# Altium PCB Plate_B.PcbDoc
Units mm, origin at the board's own origin, x right, y up, seen from the top; angles counter-clockwise.
Board outline 100 x 100 mm, 2 copper layers (Top Layer, Bottom Layer), stack 0.97 mm thick; 6 components, 2 nets, 10 pads, 0 vias.
Unrouted connection lines stored in the file: 2.
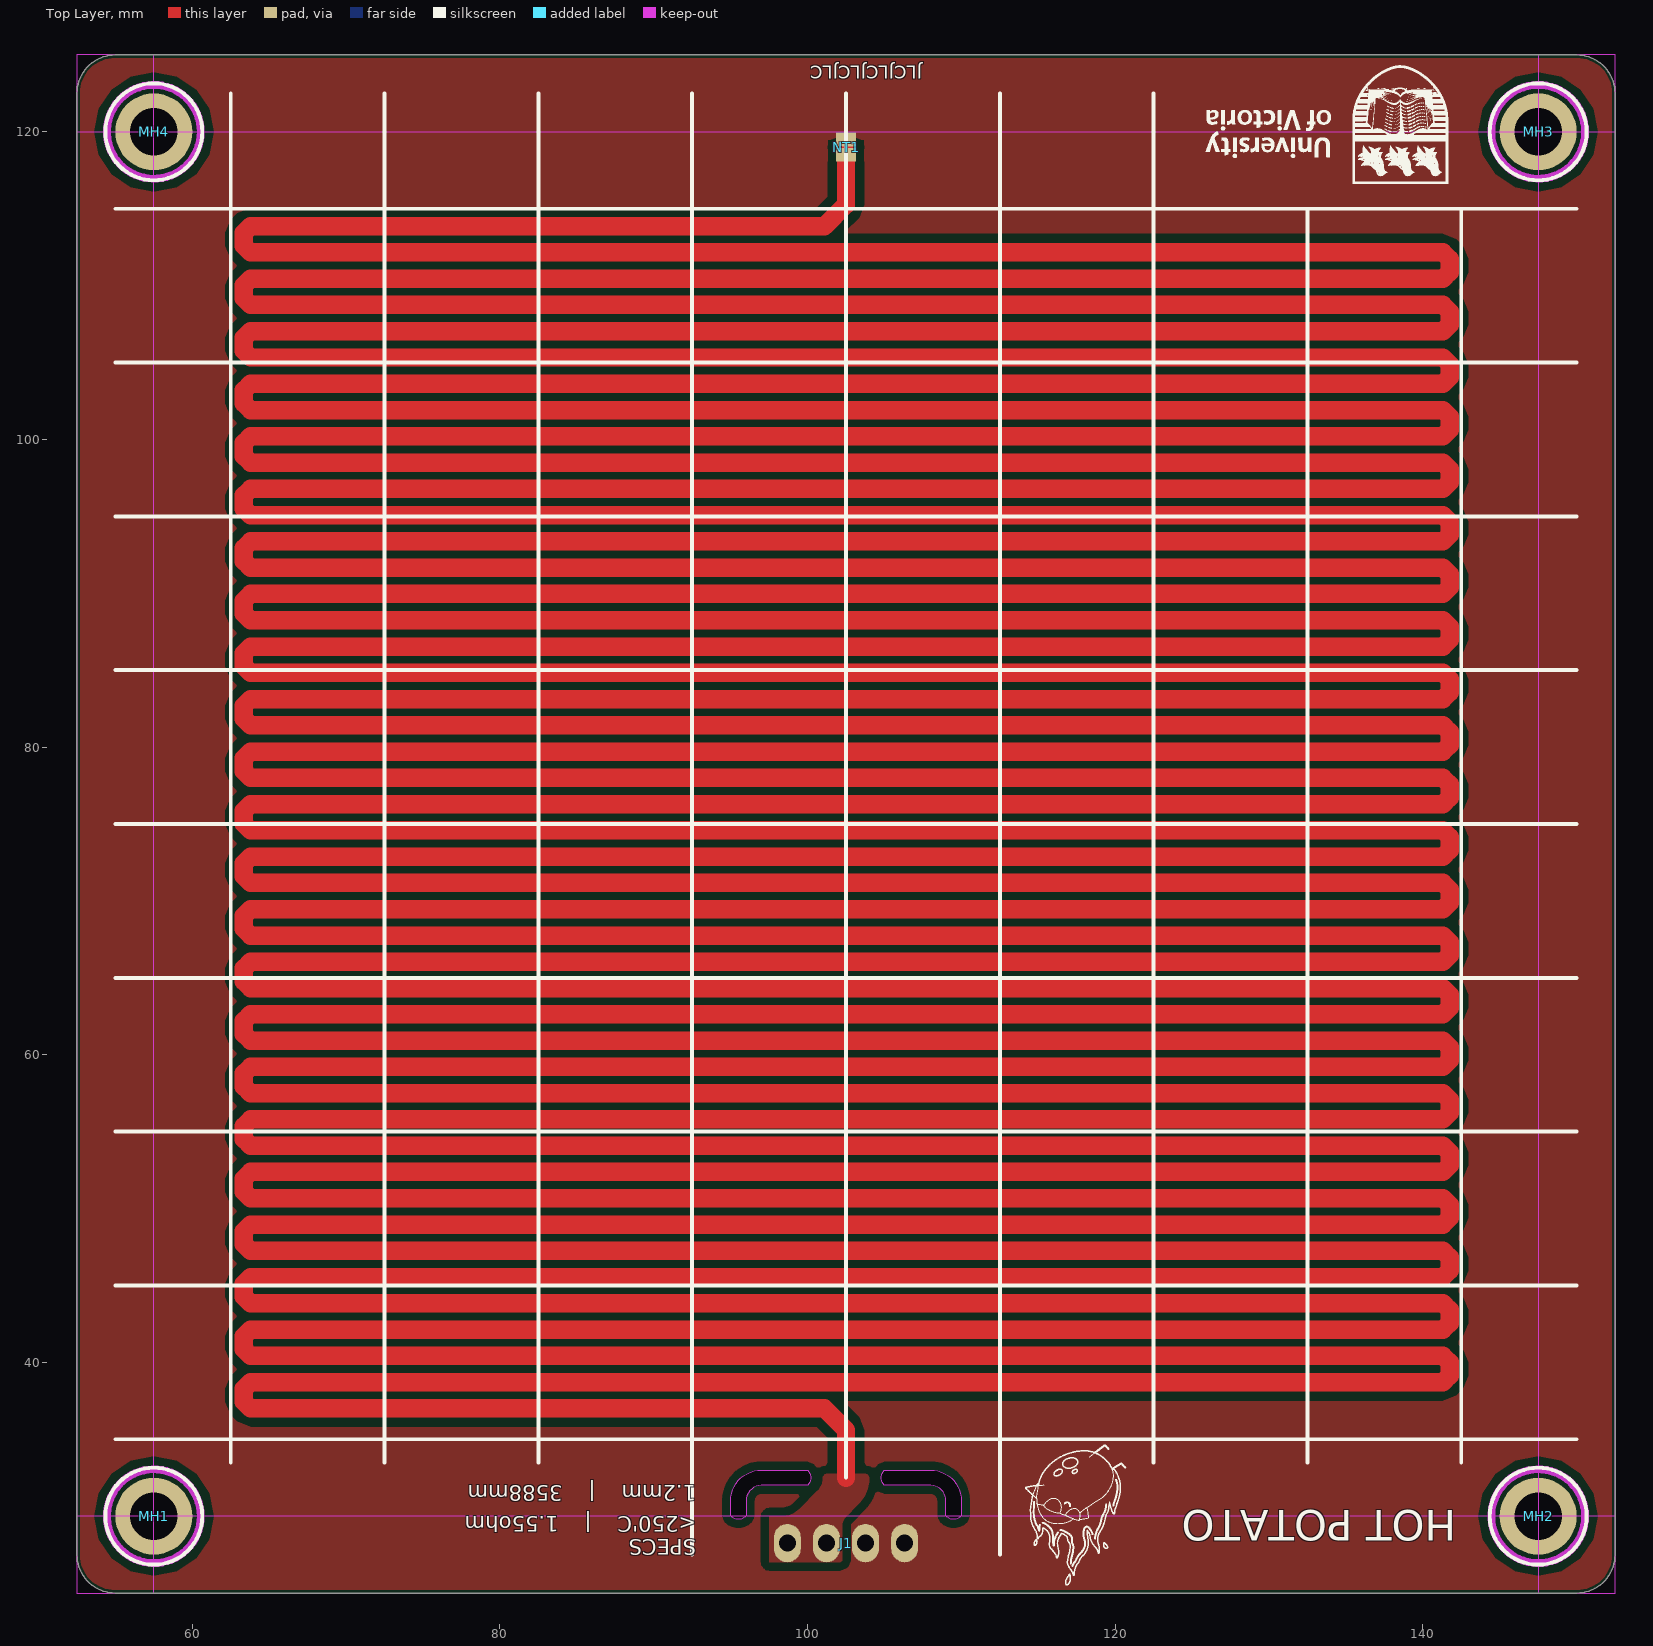
[diagram p0: Top Layer view]
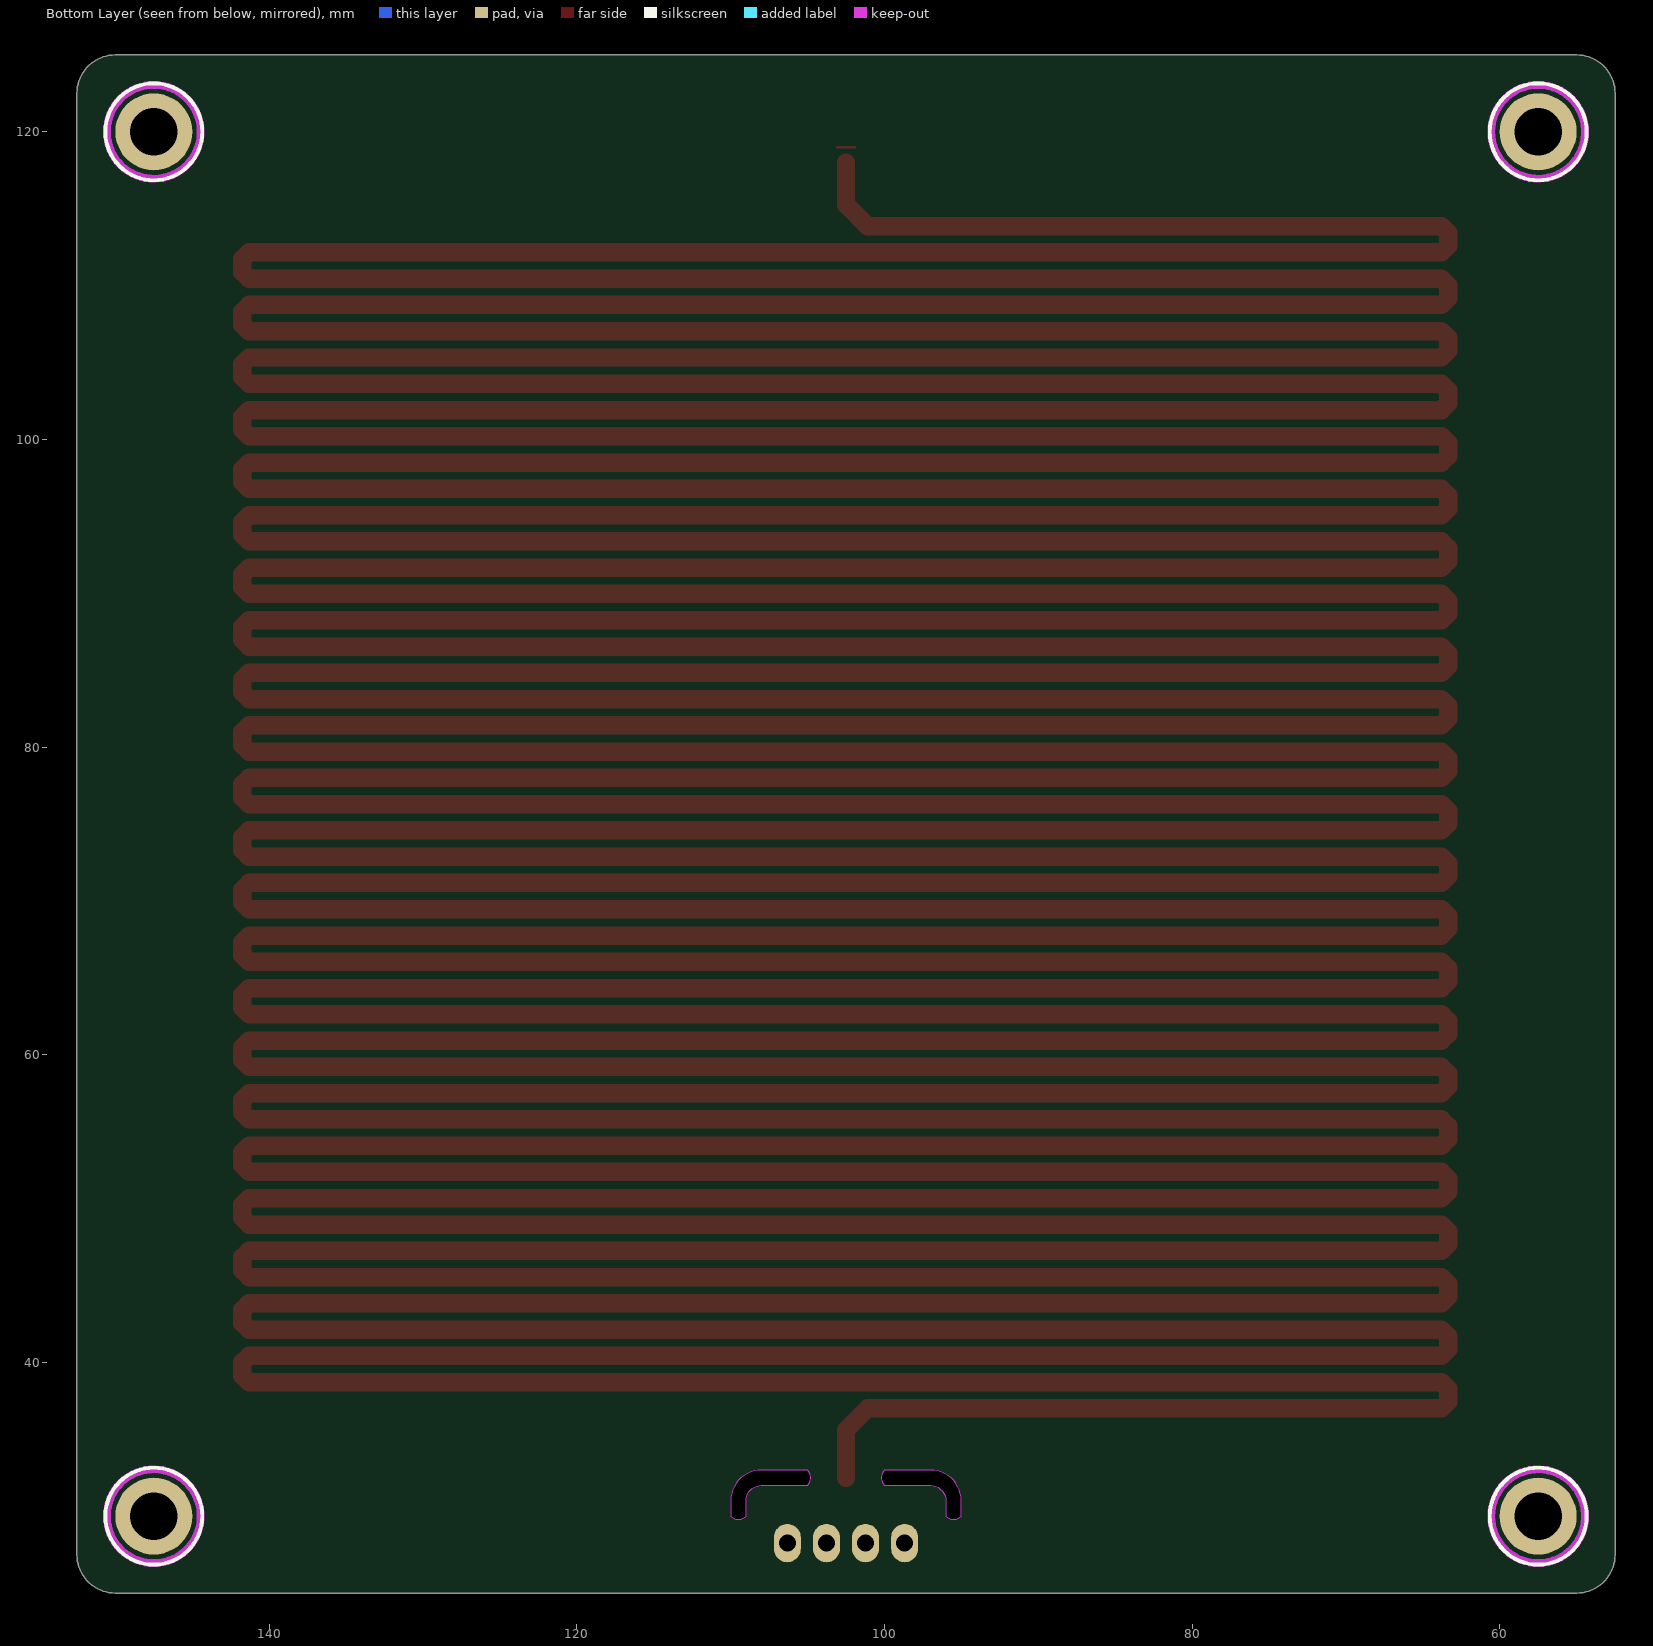
[diagram p1: Bottom Layer view, seen from below]

## Layer stack, top to bottom
Top Solder: solder mask 0.0127, Solder Resist, Dk 3.8
Top Layer: signal copper 0.035
Dielectric: core 0.9, FR-4, Dk 4.5
Bottom Layer: signal copper 0.035
Bottom Solder: solder mask 0.0127, Solder Resist, Dk 3.8

## Board outline
52.5,27.5 ccw(c55,27.5) 55,25 150,25 ccw(c150,27.5) 152.5,27.5 152.5,122.5 ccw(c150,122.5) 150,125 55,125 ccw(c55,122.5) 52.5,122.5
cut-out: 95,30 95,31 cw(c97,31) 97,33 100,33 cw(c99.5,32.5) 100,32 97,32 ccw(c97,31) 96,31 96,30 cw(c95.5,30.5)
cut-out: 105,32 cw(c105.5,32.5) 105,33 108,33 cw(c108,31) 110,31 110,30 cw(c109.5,30.5) 109,30 109,31 ccw(c108,31) 108,32

## Design rules (kind name [scope] priority, off if disabled: settings)
BoardOutlineClearance [All] p1: gap=0.2 ignorepadtopadclearanceinfootprint=FALSE
Clearance "Polygon Pour Clearance" [InPolygon] p1: gap=0.508 ignorepadtopadclearanceinfootprint=FALSE
Clearance [All] p2: gap=0.127 ignorepadtopadclearanceinfootprint=FALSE except(0.25: Arc-Hole Track-Hole SMDPad-Hole THPad-Hole Via-Hole Fill-Hole Poly-Hole Region-Hole Text-Hole)
ComponentClearance [All] p1: gap=0.127 collisioncheckmode=3 verticalgap=0.127 showdistances=TRUE
DiffPairsRouting [All] p1: maxlimit=0.254 minlimit=0.127 mostfreqgap=0.127 toplayer_minwidth=0.127 toplayer_maxwidth=25.4 toplayer_prefwidth=0.127 bottomlayer_minwidth=0.127 bottomlayer_maxwidth=25.4 bottomlayer_prefwidth=0.127 maxuncoupledlength=12.7
Height [All] p1: minheight=0 maxheight=1816.048 prefheight=12.7
HoleSize [All] p1: absolutevalues=TRUE maxlimit=6.3 minlimit=0.3 maxpercent=80.000 minpercent=20.000
HoleToHoleClearance [All] p1: gap=0.25 allowstackedmicrovias=FALSE
MinimumAnnularRing [All] p1: minimumring=0.076
MinimumSolderMaskSliver [All] p1: minsoldermaskwidth=0
PlaneClearance [All] p1: clearance=0.127
PlaneConnect PlaneConnectPowerPads [InPadClass('PowerPads')] p1: planeconnectstyle=Direct reliefexpansion=0.508 reliefentries=4 reliefconductorwidth=0.254 reliefairgap=0.254
PlaneConnect [All] p2: pad.planeconnectstyle=Relief pad.reliefexpansion=0.3 pad.reliefentries=4 pad.reliefconductorwidth=0.127 pad.reliefairgap=0.127 via.planeconnectstyle=Direct via.reliefexpansion=0.3 via.reliefentries=4 via.reliefconductorwidth=0.127 via.reliefairgap=0.127
PolygonConnect PolygonConnectPowerPads [All vs (InPadClass('PowerPads'))] p1: connectstyle=Direct reliefconductorwidth=0.254 reliefentries=4 polygonreliefangle="90 Angle" airgapwidth=0.254
PolygonConnect [All] p2: thpad.connectstyle=Relief thpad.reliefconductorwidth=0.127 thpad.reliefentries=4 thpad.polygonreliefangle="90 Angle" thpad.airgapwidth=0.127 smdpad.connectstyle=Relief smdpad.reliefconductorwidth=0.127 smdpad.reliefentries=4 smdpad.polygonreliefangle="90 Angle" smdpad.airgapwidth=0.127 via.connectstyle=Direct via.reliefconductorwidth=0.127 via.reliefentries=4 via.polygonreliefangle="90 Angle" via.airgapwidth=0.127
RoutingVias [All] p1: holewidth=0.3 width=0.6 viastyle="Through Hole" minholewidth=0.3 minwidth=0.6 maxholewidth=0.6 maxwidth=6.6
SilkToSilkClearance [All] p1: silktosilkclearance=0
SilkToSolderMaskClearance [IsPad] p1: minsilkscreentomaskgap=0.127 clearancetoexposedcopper=TRUE
SolderMaskExpansion [All] p1: expansion=0.075 istentingtop=FALSE
Width [All] p1: maxlimit=25.4 minlimit=0.127 preferedwidth=0.127 minimp=50.000000 maximp=50.000000 favimp=50.000000
20 further rules are at their usual default settings.

## Classes and differential pairs
component class plate: J1 MH1 MH2 MH3 MH4

## Components (designator, comment, footprint, x,y, rotation, side; value= is the part's Value field where it differs from the comment)
J1 "282834-4" "TE 282834-4" 102.5,28.25 r180 top
MH1 "3mm" Mount-Hole_3mm 57.5,30 r0 top locked
MH2 "3mm" Mount-Hole_3mm 147.5,30 r0 top locked
MH3 "3mm" Mount-Hole_3mm 147.5,120 r0 top locked
MH4 "3mm" Mount-Hole_3mm 57.5,120 r0 top locked
NT1 "Net Tie" NetTie_50mil 102.5,119 r270 top net-tie

## Footprints (in the part's own frame and the unit in brackets; to place one, negate y for a bottom-side part, rotate by r counter-clockwise, add the part's x,y. Pads: shape width x height; smd on the part's side, far side on the other; paste and mask are expansions set on the pad)
Mount-Hole_3mm [mm]
  round 5 hole 3.1: 1(0,0)
  Keep-Out Layer circle w0.508: c0,0 r3.048
  silkscreen extent -3.15,-3.15 3.15,3.15, body extent -2.25,-2.6 2.25,2.6, height 4.19
NetTie_50mil [mm]
  rect 0.889x1.27 smd mask+0.102: 1(-0.5,0) 2(0.5,0)
  Top Layer region: -0.075,0.635 0.075,0.635 0.075,-0.635 -0.075,-0.635
"TE 282834-4" [mm]
  oval 1.75x2.5 hole 1.1: 1(-3.81,0) 2(-1.27,0) 3(1.27,0) 4(3.81,0)
  body extent -5.31,-3.25 5.31,3.25, height 10

## Part data
J1: "TERM BLK 4P SIDE ENT 2.54MM PCB", Color=Green, Current=10A, Manufacturer="TE Connectivity AMP Connectors", Supplier Part Number 1=A98335-ND, Voltage=150V, ComponentLink1Description=Datasheet, ComponentLink1URL=https://www.te.com/commerce/DocumentDelivery/DDEController?Action=srchrtrv&DocNm=282834&DocType=Customer+Drawing&DocLang=English, ComponentLink2Description="DigiKey Link", ComponentLink2URL=http://digikey.com/product-detail/en/te-connectivity-amp-connectors/282834-4/A98335-ND/1153265, LastUpdated="2020-01-15 4:16:05 AM", Lifecycle Status=Active, Mating Orientation="Horizontal with Board", Minimum Order=1, Mounting Type="Through Hole", Number of Levels=1, Packaging=Bulk, Part Number=282834-4, Part Status=Active, Pitch="0.100\" (2.54mm)", Positions Per Level=4, Price=2.68, Series=Buchanan, Supplier 1=DigiKey, Wire Gauge="16-30 AWG", Wire Termination="Screw - Rising Cage Clamp"
MH1 MH2 MH3 MH4: library part Mount_Hole_3mm, "Mounting Hole 3mm plated"
NT1: library part NetTie_50mil, "Net Tie with 50mil trace"

## Nets (pads, with @x,y where several pads share a name; then routed paths per layer and width w, separated by ;. In a path a pad name is that pad's centre, name@x,y a point inside that pad or via, vN(x,y) a via of type N, cw(c..) or ccw(c..) an arc to the next point about the centre after c; other vN are vias at no path point)
PWR: J1.3 J1.4 NT1.2 | length 3588.2
  Top Layer w1.2: 102.5,32.5 102.5,35 102.5,35.6 101.094,37.006 63.788,37.006 63.361,37.433 63.361,38.287 63.788,38.714 141.311,38.714 141.738,39.141 141.738,39.995 141.311,40.422 63.788,40.422 63.361,40.849 63.361,41.703 63.788,42.13 141.311,42.13 141.738,42.557 141.738,43.411 141.311,43.838 63.788,43.838 63.361,44.265 63.361,45.119 63.788,45.546 141.311,45.546 141.738,45.973 141.738,46.827 141.311,47.254 63.788,47.254 63.361,47.681 63.361,48.535 63.788,48.962 141.311,48.962 141.738,49.389 141.738,50.243 141.311,50.67 63.788,50.67 63.361,51.097 63.361,51.951 63.788,52.378 141.311,52.378 141.738,52.805 141.738,53.659 141.311,54.086 63.788,54.086 63.361,54.513 63.361,55.367 63.788,55.794 141.311,55.794 141.738,56.221 141.738,57.075 141.311,57.502 63.788,57.502 63.361,57.929 63.361,58.783 63.788,59.21 141.311,59.21 141.738,59.637 141.738,60.491 141.311,60.918 63.788,60.918 63.361,61.345 63.361,62.199 63.788,62.626 141.311,62.626 141.738,63.053 141.738,63.907 141.311,64.334 63.788,64.334 63.361,64.761 63.361,65.615 63.788,66.042 141.311,66.042 141.738,66.469 141.738,67.323 141.311,67.75 63.788,67.75 63.361,68.177 63.361,69.031 63.788,69.458 141.311,69.458 141.738,69.885 141.738,70.739 141.311,71.166 63.788,71.166 63.361,71.593 63.361,72.447 63.788,72.874 141.311,72.874 141.738,73.301 141.738,74.155 141.311,74.582 63.788,74.582 63.361,75.009 63.361,75.863 63.788,76.29 141.311,76.29 141.738,76.717 141.738,77.571 141.311,77.998 63.788,77.998 63.361,78.425 63.361,79.279 63.788,79.706 141.311,79.706 141.738,80.133 141.738,80.987 141.311,81.414 63.788,81.414 63.361,81.841 63.361,82.695 63.788,83.122 141.311,83.122 141.738,83.549 141.738,84.403 141.311,84.83 63.788,84.83 63.361,85.257 63.361,86.111 63.788,86.538 141.311,86.538 141.738,86.965 141.738,87.819 141.311,88.246 63.788,88.246 63.361,88.673 63.361,89.527 63.788,89.954 141.311,89.954 141.738,90.381 141.738,91.235 141.311,91.662 63.788,91.662 63.361,92.089 63.361,92.943 63.788,93.37 141.311,93.37 141.738,93.797 141.738,94.651 141.311,95.078 63.788,95.078 63.361,95.505 63.361,96.359 63.788,96.786 141.311,96.786 141.738,97.213 141.738,98.067 141.311,98.494 63.788,98.494 63.361,98.921 63.361,99.775 63.788,100.202 141.311,100.202 141.738,100.629 141.738,101.483 141.311,101.91 63.788,101.91 63.361,102.337 63.361,103.191 63.788,103.618 141.311,103.618 141.738,104.045 141.738,104.899 141.311,105.326 63.788,105.326 63.361,105.753 63.361,106.607 63.788,107.034 141.311,107.034 141.738,107.461 141.738,108.315 141.311,108.742 63.788,108.742 63.361,109.169 63.361,110.023 63.788,110.45 141.311,110.45 141.738,110.877 141.738,111.731 141.311,112.158 63.788,112.158 63.361,112.585 63.361,113.439 63.788,113.866 101.094,113.866 102.5,115.272 102.5,117 102.5,118
RETURN: J1.1 J1.2 NT1.1
pads on no net: MH1.1 MH2.1 MH3.1 MH4.1

## Polygon pours and split planes (outlines as drawn)
RETURN on Top Layer "RETURN_L01_P007" (solid, pour order 7): 52.5,125 152.5,125 152.5,25 52.5,25
PWR on Top Layer "ggg" (solid, pour order 5): 101.25,32.75 103.75,32.75 cw(c103.75,32.5) 104,32.5 cw(c101.497,32.499) 103.266,30.728 102.473,29.936 ccw(c103.013,29.396) 102.25,29.396 102.25,27 97.5,27 97.5,30 98.293,30 ccw(c98.293,31.707) 99.5,30.5 100.646,31.646 ccw(c99.793,32.5) 101,32.5 cw(c101.25,32.5)

## Keep-outs
Top Layer:
  region: 52.5,120 152.5,120 152.5,125 52.5,125
  region: 52.5,25 152.5,25 152.5,30 52.5,30
  region: 147.5,125 147.5,25 152.5,25 152.5,125
  region: 52.5,125 52.5,25 57.5,25 57.5,125

## Silkscreen, mask and mechanical layers (free items; w line width, h text height)
Top Overlay:
  drawing of 192 lines, arcs and shapes, not listed
  text "JLCJLCJLCJLC" at 107.457,124.3 h0.85 r180
  text "1.2mm    |    3588mm" at 92.75,32 h1 r180
  text "HOT POTATO" at 142.164,30.4 h2 r180
  text "SPECS / <250'C    |    1.55ohm" at 92.75,30 h1 r180
Dimensions:
  lines w0.254: 52.5,75 152.5,75 ; 102.5,25 102.5,125 ; 152.5,25 52.5,125 ; 52.5,25 152.5,125 ; 52.5,25 52.5,25 ; 52.5,125 52.5,125 ; 52.5,125 52.5,125 ; 152.5,125 152.5,125
Board:
  lines w0.254: 52.5,27.5 ccw(c55,27.5) 55,25 150,25 ccw(c150,27.5) 152.5,27.5 152.5,122.5 ccw(c150,122.5) 150,125 55,125 ccw(c55,122.5) 52.5,122.5 52.5,27.5 ; 95,30 ccw(c95.5,30.5) 96,30 96,31 cw(c97,31) 97,32 100,32 ccw(c99.5,32.5) 100,33 97,33 ccw(c97,31) 95,31 95,30 ; 105,32 cw(c105.5,32.5) 105,33 108,33 cw(c108,31) 110,31 110,30 cw(c109.5,30.5) 109,30 109,31 ccw(c108,31) 108,32 105,32
Formula:
  text "Setting Trace Length and Width: /  Trace Length: PCB panel -> NET name PWR -> \"Routed Length\" /                Adj: Select Hotplate traces -> Tweak \"Space\" /  Trace Width: Select Base or tale of track -> properties -> \"Width\" /                Adj: Select Hotplate Traces -> *DELETE* -> Change Width -> \"Interactively tune Trace Length:" at 160,122.5 h1.52

## Dimensions
57.5,30 to 57.5,120 on Dimensions
57.5,120 to 147.5,120 on Dimensions
55,105 to 55,115 on Top Overlay
62.5,122.5 to 72.5,122.5 on Top Overlay
57.5,120 to 55,125 on Dimensions
57.5,120 to 52.5,122.5 on Dimensions
52.5,25 to 52.5,125 on Dimensions
52.5,125 to 152.5,125 on Dimensions